# EAGLE board SparkFun_Qwiic_Micro_Accelerometer_BMA400-Panel (EAGLE 9.6.2), part 1 of 7
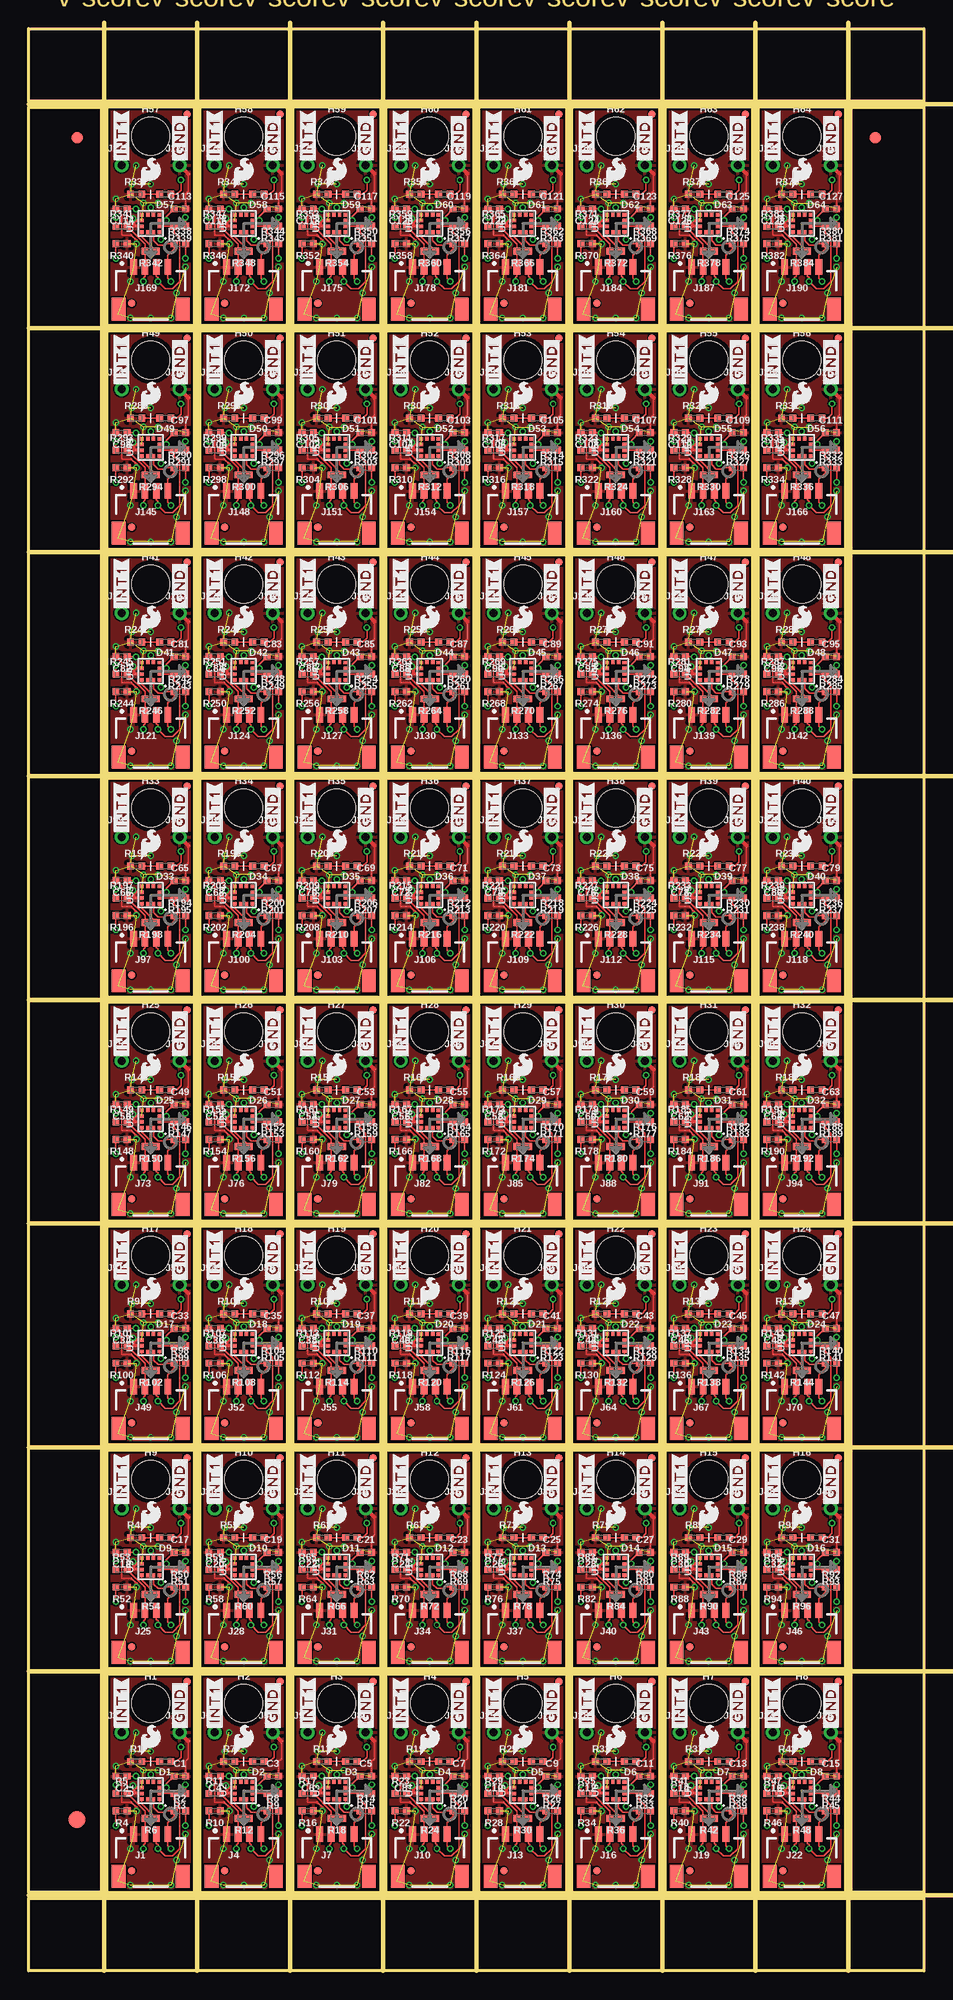
[diagram p0: board, top side]
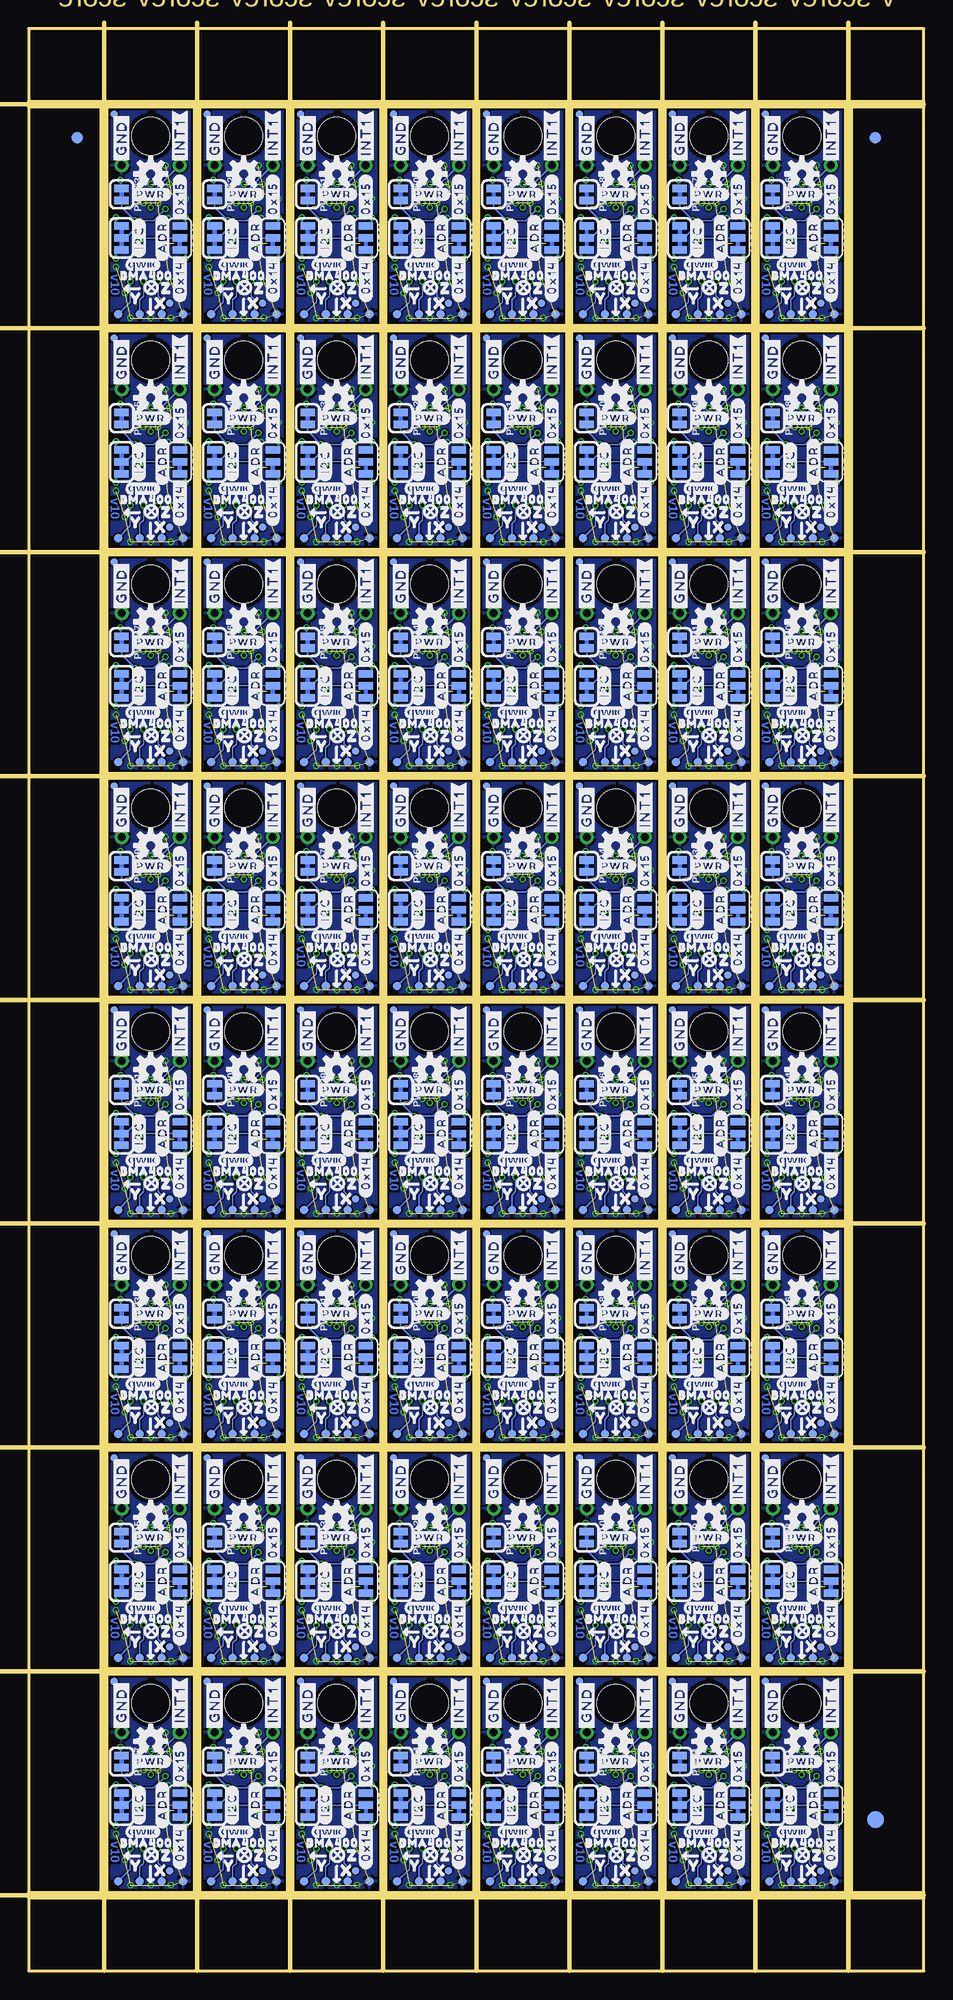
[diagram p1: board, bottom side, seen from below]

Size 78.23 x 169.67 mm. Coordinates in mm from the lower left corner, seen from the top.
Outline: 272 segments
Copper layers (1*16): Top 0.035mm / dielectric 1.5mm / Bottom 0.035mm
Design rules "SparkFun_Qwiic_Micro_Accelerometer_BMA400": minimum track width 5mil, minimum drill 0.3mm, track to track 5mil, track to pad 5mil, pad to pad 5mil, via to via 5mil, smd to smd 5mil, copper to edge 7mil, drill to drill 7mil, minimum pad ring 5mil, minimum via ring 5mil, stop-mask expansion 2.5mil, vias tented up to drill 25mil, thermal gap 10mil
tRestrict: area 9.9,15.7 to 9.9,15.8; area 18,15.7 to 18.1,15.8; area 26.1,15.7 to 26.2,15.8; area 34.2,15.7 to 34.3,15.8; area 42.4,15.7 to 42.4,15.8; area 50.5,15.7 to 50.6,15.8; area 58.6,15.7 to 58.7,15.8; area 66.8,15.7 to 66.8,15.8; area 9.9,35.3 to 9.9,35.3; area 18,35.3 to 18.1,35.3; area 26.1,35.3 to 26.2,35.3; area 34.2,35.3 to 34.3,35.3; 52 more areas
Milling: 18 lines

## Footprints (pad centres in the part's own frame; a part is rotated, then mirrored left to right if it is on the bottom)
SMT-JUMPER_3_1-NC_TRACE_SILK = smd 0.66 x 1.27: 1 -1.041,0; 2 0,0; 3 1.041,0
0402-TIGHT = smd 0.6 x 0.6: 1 -0.5,0; 2 0.5,0
LED-0402 = smd 0.6 x 0.6: A -0.5,0; C 0.5,0
FIDUCIAL-1X2 = smd 1 x 1: 1 0,0
FIDUCIAL-1.5X3 = smd 1.5 x 1.5: 1 0,0
FIDUCIAL-MICRO = smd 0.635 x 0.635: 1 0,0
STAND-OFF = hole 3.302: 0,0
SMT-JUMPER_3_2-NC_TRACE_SILK = smd 0.66 x 1.27: 1 -1.041,0; 2 0,0; 3 1.041,0
JST04_1MM_RA = smd 0.6 x 1.35: 1 -1.5,0; 2 -0.5,0; 3 0.5,0; 4 1.5,0 | smd 1.2 x 2: NC1 2.8,-3.675; NC2 -2.8,-3.675
1X01_1MM_NO_SILK = drill 0.7 pad 1.2: 1 0,0
SMT-JUMPER_2_NC_TRACE_SILK = smd 0.66 x 1.27: 1 -0.521,0; 2 0.521,0
PAD.03X.03 = smd 0.762 x 0.762: 1 0,0
BMA400 = smd 0.3 x 0.35: 1 -0.75,-0.775; 2 -0.25,-0.775; 3 0.25,-0.775; 4 0.75,-0.775; 7 0.75,0.775; 8 0.25,0.775; 9 -0.25,0.775; 10 -0.75,0.775 | smd 0.35 x 0.3: 5 0.775,-0.25; 6 0.775,0.25; 11 -0.775,0.25; 12 -0.775,-0.25

## Placement (x,y rotation side)
ADR  JUMPER-SMT_3_1-NC_TRACE_SILK  [SMT-JUMPER_3_1-NC_TRACE_SILK]  8.13,14.48 270 bottom
ADR1  JUMPER-SMT_3_1-NC_TRACE_SILK  [SMT-JUMPER_3_1-NC_TRACE_SILK]  16.26,14.48 270 bottom
ADR2  JUMPER-SMT_3_1-NC_TRACE_SILK  [SMT-JUMPER_3_1-NC_TRACE_SILK]  24.38,14.48 270 bottom
ADR3  JUMPER-SMT_3_1-NC_TRACE_SILK  [SMT-JUMPER_3_1-NC_TRACE_SILK]  32.51,14.48 270 bottom
ADR4  JUMPER-SMT_3_1-NC_TRACE_SILK  [SMT-JUMPER_3_1-NC_TRACE_SILK]  40.64,14.48 270 bottom
ADR5  JUMPER-SMT_3_1-NC_TRACE_SILK  [SMT-JUMPER_3_1-NC_TRACE_SILK]  48.77,14.48 270 bottom
ADR6  JUMPER-SMT_3_1-NC_TRACE_SILK  [SMT-JUMPER_3_1-NC_TRACE_SILK]  56.9,14.48 270 bottom
ADR7  JUMPER-SMT_3_1-NC_TRACE_SILK  [SMT-JUMPER_3_1-NC_TRACE_SILK]  65.02,14.48 270 bottom
ADR8  JUMPER-SMT_3_1-NC_TRACE_SILK  [SMT-JUMPER_3_1-NC_TRACE_SILK]  8.13,34.04 270 bottom
ADR9  JUMPER-SMT_3_1-NC_TRACE_SILK  [SMT-JUMPER_3_1-NC_TRACE_SILK]  16.26,34.04 270 bottom
ADR10  JUMPER-SMT_3_1-NC_TRACE_SILK  [SMT-JUMPER_3_1-NC_TRACE_SILK]  24.38,34.04 270 bottom
ADR11  JUMPER-SMT_3_1-NC_TRACE_SILK  [SMT-JUMPER_3_1-NC_TRACE_SILK]  32.51,34.04 270 bottom
ADR12  JUMPER-SMT_3_1-NC_TRACE_SILK  [SMT-JUMPER_3_1-NC_TRACE_SILK]  40.64,34.04 270 bottom
ADR13  JUMPER-SMT_3_1-NC_TRACE_SILK  [SMT-JUMPER_3_1-NC_TRACE_SILK]  48.77,34.04 270 bottom
ADR14  JUMPER-SMT_3_1-NC_TRACE_SILK  [SMT-JUMPER_3_1-NC_TRACE_SILK]  56.9,34.04 270 bottom
ADR15  JUMPER-SMT_3_1-NC_TRACE_SILK  [SMT-JUMPER_3_1-NC_TRACE_SILK]  65.02,34.04 270 bottom
ADR16  JUMPER-SMT_3_1-NC_TRACE_SILK  [SMT-JUMPER_3_1-NC_TRACE_SILK]  8.13,53.59 270 bottom
ADR17  JUMPER-SMT_3_1-NC_TRACE_SILK  [SMT-JUMPER_3_1-NC_TRACE_SILK]  16.26,53.59 270 bottom
ADR18  JUMPER-SMT_3_1-NC_TRACE_SILK  [SMT-JUMPER_3_1-NC_TRACE_SILK]  24.38,53.59 270 bottom
ADR19  JUMPER-SMT_3_1-NC_TRACE_SILK  [SMT-JUMPER_3_1-NC_TRACE_SILK]  32.51,53.59 270 bottom
ADR20  JUMPER-SMT_3_1-NC_TRACE_SILK  [SMT-JUMPER_3_1-NC_TRACE_SILK]  40.64,53.59 270 bottom
ADR21  JUMPER-SMT_3_1-NC_TRACE_SILK  [SMT-JUMPER_3_1-NC_TRACE_SILK]  48.77,53.59 270 bottom
ADR22  JUMPER-SMT_3_1-NC_TRACE_SILK  [SMT-JUMPER_3_1-NC_TRACE_SILK]  56.9,53.59 270 bottom
ADR23  JUMPER-SMT_3_1-NC_TRACE_SILK  [SMT-JUMPER_3_1-NC_TRACE_SILK]  65.02,53.59 270 bottom
ADR24  JUMPER-SMT_3_1-NC_TRACE_SILK  [SMT-JUMPER_3_1-NC_TRACE_SILK]  8.13,73.15 270 bottom
ADR25  JUMPER-SMT_3_1-NC_TRACE_SILK  [SMT-JUMPER_3_1-NC_TRACE_SILK]  16.26,73.15 270 bottom
ADR26  JUMPER-SMT_3_1-NC_TRACE_SILK  [SMT-JUMPER_3_1-NC_TRACE_SILK]  24.38,73.15 270 bottom
ADR27  JUMPER-SMT_3_1-NC_TRACE_SILK  [SMT-JUMPER_3_1-NC_TRACE_SILK]  32.51,73.15 270 bottom
ADR28  JUMPER-SMT_3_1-NC_TRACE_SILK  [SMT-JUMPER_3_1-NC_TRACE_SILK]  40.64,73.15 270 bottom
ADR29  JUMPER-SMT_3_1-NC_TRACE_SILK  [SMT-JUMPER_3_1-NC_TRACE_SILK]  48.77,73.15 270 bottom
ADR30  JUMPER-SMT_3_1-NC_TRACE_SILK  [SMT-JUMPER_3_1-NC_TRACE_SILK]  56.9,73.15 270 bottom
ADR31  JUMPER-SMT_3_1-NC_TRACE_SILK  [SMT-JUMPER_3_1-NC_TRACE_SILK]  65.02,73.15 270 bottom
ADR32  JUMPER-SMT_3_1-NC_TRACE_SILK  [SMT-JUMPER_3_1-NC_TRACE_SILK]  8.13,92.71 270 bottom
ADR33  JUMPER-SMT_3_1-NC_TRACE_SILK  [SMT-JUMPER_3_1-NC_TRACE_SILK]  16.26,92.71 270 bottom
ADR34  JUMPER-SMT_3_1-NC_TRACE_SILK  [SMT-JUMPER_3_1-NC_TRACE_SILK]  24.38,92.71 270 bottom
ADR35  JUMPER-SMT_3_1-NC_TRACE_SILK  [SMT-JUMPER_3_1-NC_TRACE_SILK]  32.51,92.71 270 bottom
ADR36  JUMPER-SMT_3_1-NC_TRACE_SILK  [SMT-JUMPER_3_1-NC_TRACE_SILK]  40.64,92.71 270 bottom
ADR37  JUMPER-SMT_3_1-NC_TRACE_SILK  [SMT-JUMPER_3_1-NC_TRACE_SILK]  48.77,92.71 270 bottom
ADR38  JUMPER-SMT_3_1-NC_TRACE_SILK  [SMT-JUMPER_3_1-NC_TRACE_SILK]  56.9,92.71 270 bottom
ADR39  JUMPER-SMT_3_1-NC_TRACE_SILK  [SMT-JUMPER_3_1-NC_TRACE_SILK]  65.02,92.71 270 bottom
ADR40  JUMPER-SMT_3_1-NC_TRACE_SILK  [SMT-JUMPER_3_1-NC_TRACE_SILK]  8.13,112.27 270 bottom
ADR41  JUMPER-SMT_3_1-NC_TRACE_SILK  [SMT-JUMPER_3_1-NC_TRACE_SILK]  16.26,112.27 270 bottom
ADR42  JUMPER-SMT_3_1-NC_TRACE_SILK  [SMT-JUMPER_3_1-NC_TRACE_SILK]  24.38,112.27 270 bottom
ADR43  JUMPER-SMT_3_1-NC_TRACE_SILK  [SMT-JUMPER_3_1-NC_TRACE_SILK]  32.51,112.27 270 bottom
ADR44  JUMPER-SMT_3_1-NC_TRACE_SILK  [SMT-JUMPER_3_1-NC_TRACE_SILK]  40.64,112.27 270 bottom
ADR45  JUMPER-SMT_3_1-NC_TRACE_SILK  [SMT-JUMPER_3_1-NC_TRACE_SILK]  48.77,112.27 270 bottom
ADR46  JUMPER-SMT_3_1-NC_TRACE_SILK  [SMT-JUMPER_3_1-NC_TRACE_SILK]  56.9,112.27 270 bottom
ADR47  JUMPER-SMT_3_1-NC_TRACE_SILK  [SMT-JUMPER_3_1-NC_TRACE_SILK]  65.02,112.27 270 bottom
ADR48  JUMPER-SMT_3_1-NC_TRACE_SILK  [SMT-JUMPER_3_1-NC_TRACE_SILK]  8.13,131.83 270 bottom
ADR49  JUMPER-SMT_3_1-NC_TRACE_SILK  [SMT-JUMPER_3_1-NC_TRACE_SILK]  16.26,131.83 270 bottom
ADR50  JUMPER-SMT_3_1-NC_TRACE_SILK  [SMT-JUMPER_3_1-NC_TRACE_SILK]  24.38,131.83 270 bottom
ADR51  JUMPER-SMT_3_1-NC_TRACE_SILK  [SMT-JUMPER_3_1-NC_TRACE_SILK]  32.51,131.83 270 bottom
ADR52  JUMPER-SMT_3_1-NC_TRACE_SILK  [SMT-JUMPER_3_1-NC_TRACE_SILK]  40.64,131.83 270 bottom
ADR53  JUMPER-SMT_3_1-NC_TRACE_SILK  [SMT-JUMPER_3_1-NC_TRACE_SILK]  48.77,131.83 270 bottom
ADR54  JUMPER-SMT_3_1-NC_TRACE_SILK  [SMT-JUMPER_3_1-NC_TRACE_SILK]  56.9,131.83 270 bottom
ADR55  JUMPER-SMT_3_1-NC_TRACE_SILK  [SMT-JUMPER_3_1-NC_TRACE_SILK]  65.02,131.83 270 bottom
ADR56  JUMPER-SMT_3_1-NC_TRACE_SILK  [SMT-JUMPER_3_1-NC_TRACE_SILK]  8.13,151.38 270 bottom
ADR57  JUMPER-SMT_3_1-NC_TRACE_SILK  [SMT-JUMPER_3_1-NC_TRACE_SILK]  16.26,151.38 270 bottom
ADR58  JUMPER-SMT_3_1-NC_TRACE_SILK  [SMT-JUMPER_3_1-NC_TRACE_SILK]  24.38,151.38 270 bottom
ADR59  JUMPER-SMT_3_1-NC_TRACE_SILK  [SMT-JUMPER_3_1-NC_TRACE_SILK]  32.51,151.38 270 bottom
ADR60  JUMPER-SMT_3_1-NC_TRACE_SILK  [SMT-JUMPER_3_1-NC_TRACE_SILK]  40.64,151.38 270 bottom
ADR61  JUMPER-SMT_3_1-NC_TRACE_SILK  [SMT-JUMPER_3_1-NC_TRACE_SILK]  48.77,151.38 270 bottom
ADR62  JUMPER-SMT_3_1-NC_TRACE_SILK  [SMT-JUMPER_3_1-NC_TRACE_SILK]  56.9,151.38 270 bottom
ADR63  JUMPER-SMT_3_1-NC_TRACE_SILK  [SMT-JUMPER_3_1-NC_TRACE_SILK]  65.02,151.38 270 bottom
C1  0.1uF  [0402-TIGHT]  13.21,17.02 0 top
C2  0.1uF  [0402-TIGHT]  8.13,17.02 180 top
C3  0.1uF  [0402-TIGHT]  21.34,17.02 0 top
C4  0.1uF  [0402-TIGHT]  16.26,17.02 180 top
C5  0.1uF  [0402-TIGHT]  29.46,17.02 0 top
C6  0.1uF  [0402-TIGHT]  24.38,17.02 180 top
C7  0.1uF  [0402-TIGHT]  37.59,17.02 0 top
C8  0.1uF  [0402-TIGHT]  32.51,17.02 180 top
C9  0.1uF  [0402-TIGHT]  45.72,17.02 0 top
C10  0.1uF  [0402-TIGHT]  40.64,17.02 180 top
C11  0.1uF  [0402-TIGHT]  53.85,17.02 0 top
C12  0.1uF  [0402-TIGHT]  48.77,17.02 180 top
C13  0.1uF  [0402-TIGHT]  61.98,17.02 0 top
C14  0.1uF  [0402-TIGHT]  56.9,17.02 180 top
C15  0.1uF  [0402-TIGHT]  70.1,17.02 0 top
C16  0.1uF  [0402-TIGHT]  65.02,17.02 180 top
C17  0.1uF  [0402-TIGHT]  13.21,36.58 0 top
C18  0.1uF  [0402-TIGHT]  8.13,36.58 180 top
C19  0.1uF  [0402-TIGHT]  21.34,36.58 0 top
C20  0.1uF  [0402-TIGHT]  16.26,36.58 180 top
C21  0.1uF  [0402-TIGHT]  29.46,36.58 0 top
C22  0.1uF  [0402-TIGHT]  24.38,36.58 180 top
C23  0.1uF  [0402-TIGHT]  37.59,36.58 0 top
C24  0.1uF  [0402-TIGHT]  32.51,36.58 180 top
C25  0.1uF  [0402-TIGHT]  45.72,36.58 0 top
C26  0.1uF  [0402-TIGHT]  40.64,36.58 180 top
C27  0.1uF  [0402-TIGHT]  53.85,36.58 0 top
C28  0.1uF  [0402-TIGHT]  48.77,36.58 180 top
C29  0.1uF  [0402-TIGHT]  61.98,36.58 0 top
C30  0.1uF  [0402-TIGHT]  56.9,36.58 180 top
C31  0.1uF  [0402-TIGHT]  70.1,36.58 0 top
C32  0.1uF  [0402-TIGHT]  65.02,36.58 180 top
C33  0.1uF  [0402-TIGHT]  13.21,56.13 0 top
C34  0.1uF  [0402-TIGHT]  8.13,56.13 180 top
C35  0.1uF  [0402-TIGHT]  21.34,56.13 0 top
C36  0.1uF  [0402-TIGHT]  16.26,56.13 180 top
C37  0.1uF  [0402-TIGHT]  29.46,56.13 0 top
C38  0.1uF  [0402-TIGHT]  24.38,56.13 180 top
C39  0.1uF  [0402-TIGHT]  37.59,56.13 0 top
C40  0.1uF  [0402-TIGHT]  32.51,56.13 180 top
C41  0.1uF  [0402-TIGHT]  45.72,56.13 0 top
C42  0.1uF  [0402-TIGHT]  40.64,56.13 180 top
C43  0.1uF  [0402-TIGHT]  53.85,56.13 0 top
C44  0.1uF  [0402-TIGHT]  48.77,56.13 180 top
C45  0.1uF  [0402-TIGHT]  61.98,56.13 0 top
C46  0.1uF  [0402-TIGHT]  56.9,56.13 180 top
C47  0.1uF  [0402-TIGHT]  70.1,56.13 0 top
C48  0.1uF  [0402-TIGHT]  65.02,56.13 180 top
C49  0.1uF  [0402-TIGHT]  13.21,75.69 0 top
C50  0.1uF  [0402-TIGHT]  8.13,75.69 180 top
C51  0.1uF  [0402-TIGHT]  21.34,75.69 0 top
C52  0.1uF  [0402-TIGHT]  16.26,75.69 180 top
C53  0.1uF  [0402-TIGHT]  29.46,75.69 0 top
C54  0.1uF  [0402-TIGHT]  24.38,75.69 180 top
C55  0.1uF  [0402-TIGHT]  37.59,75.69 0 top
C56  0.1uF  [0402-TIGHT]  32.51,75.69 180 top
C57  0.1uF  [0402-TIGHT]  45.72,75.69 0 top
C58  0.1uF  [0402-TIGHT]  40.64,75.69 180 top
C59  0.1uF  [0402-TIGHT]  53.85,75.69 0 top
C60  0.1uF  [0402-TIGHT]  48.77,75.69 180 top
C61  0.1uF  [0402-TIGHT]  61.98,75.69 0 top
C62  0.1uF  [0402-TIGHT]  56.9,75.69 180 top
C63  0.1uF  [0402-TIGHT]  70.1,75.69 0 top
C64  0.1uF  [0402-TIGHT]  65.02,75.69 180 top
C65  0.1uF  [0402-TIGHT]  13.21,95.25 0 top
C66  0.1uF  [0402-TIGHT]  8.13,95.25 180 top
C67  0.1uF  [0402-TIGHT]  21.34,95.25 0 top
C68  0.1uF  [0402-TIGHT]  16.26,95.25 180 top
C69  0.1uF  [0402-TIGHT]  29.46,95.25 0 top
C70  0.1uF  [0402-TIGHT]  24.38,95.25 180 top
C71  0.1uF  [0402-TIGHT]  37.59,95.25 0 top
C72  0.1uF  [0402-TIGHT]  32.51,95.25 180 top
C73  0.1uF  [0402-TIGHT]  45.72,95.25 0 top
C74  0.1uF  [0402-TIGHT]  40.64,95.25 180 top
C75  0.1uF  [0402-TIGHT]  53.85,95.25 0 top
C76  0.1uF  [0402-TIGHT]  48.77,95.25 180 top
C77  0.1uF  [0402-TIGHT]  61.98,95.25 0 top
C78  0.1uF  [0402-TIGHT]  56.9,95.25 180 top
C79  0.1uF  [0402-TIGHT]  70.1,95.25 0 top
C80  0.1uF  [0402-TIGHT]  65.02,95.25 180 top
C81  0.1uF  [0402-TIGHT]  13.21,114.81 0 top
C82  0.1uF  [0402-TIGHT]  8.13,114.81 180 top
C83  0.1uF  [0402-TIGHT]  21.34,114.81 0 top
C84  0.1uF  [0402-TIGHT]  16.26,114.81 180 top
C85  0.1uF  [0402-TIGHT]  29.46,114.81 0 top
C86  0.1uF  [0402-TIGHT]  24.38,114.81 180 top
C87  0.1uF  [0402-TIGHT]  37.59,114.81 0 top
C88  0.1uF  [0402-TIGHT]  32.51,114.81 180 top
C89  0.1uF  [0402-TIGHT]  45.72,114.81 0 top
C90  0.1uF  [0402-TIGHT]  40.64,114.81 180 top
C91  0.1uF  [0402-TIGHT]  53.85,114.81 0 top
C92  0.1uF  [0402-TIGHT]  48.77,114.81 180 top
C93  0.1uF  [0402-TIGHT]  61.98,114.81 0 top
C94  0.1uF  [0402-TIGHT]  56.9,114.81 180 top
C95  0.1uF  [0402-TIGHT]  70.1,114.81 0 top
C96  0.1uF  [0402-TIGHT]  65.02,114.81 180 top
C97  0.1uF  [0402-TIGHT]  13.21,134.37 0 top
C98  0.1uF  [0402-TIGHT]  8.13,134.37 180 top
C99  0.1uF  [0402-TIGHT]  21.34,134.37 0 top
C100  0.1uF  [0402-TIGHT]  16.26,134.37 180 top
C101  0.1uF  [0402-TIGHT]  29.46,134.37 0 top
C102  0.1uF  [0402-TIGHT]  24.38,134.37 180 top
C103  0.1uF  [0402-TIGHT]  37.59,134.37 0 top
C104  0.1uF  [0402-TIGHT]  32.51,134.37 180 top
C105  0.1uF  [0402-TIGHT]  45.72,134.37 0 top
C106  0.1uF  [0402-TIGHT]  40.64,134.37 180 top
C107  0.1uF  [0402-TIGHT]  53.85,134.37 0 top
C108  0.1uF  [0402-TIGHT]  48.77,134.37 180 top
C109  0.1uF  [0402-TIGHT]  61.98,134.37 0 top
C110  0.1uF  [0402-TIGHT]  56.9,134.37 180 top
C111  0.1uF  [0402-TIGHT]  70.1,134.37 0 top
C112  0.1uF  [0402-TIGHT]  65.02,134.37 180 top
C113  0.1uF  [0402-TIGHT]  13.21,153.92 0 top
C114  0.1uF  [0402-TIGHT]  8.13,153.92 180 top
C115  0.1uF  [0402-TIGHT]  21.34,153.92 0 top
C116  0.1uF  [0402-TIGHT]  16.26,153.92 180 top
C117  0.1uF  [0402-TIGHT]  29.46,153.92 0 top
C118  0.1uF  [0402-TIGHT]  24.38,153.92 180 top
C119  0.1uF  [0402-TIGHT]  37.59,153.92 0 top
C120  0.1uF  [0402-TIGHT]  32.51,153.92 180 top
C121  0.1uF  [0402-TIGHT]  45.72,153.92 0 top
C122  0.1uF  [0402-TIGHT]  40.64,153.92 180 top
C123  0.1uF  [0402-TIGHT]  53.85,153.92 0 top
C124  0.1uF  [0402-TIGHT]  48.77,153.92 180 top
C125  0.1uF  [0402-TIGHT]  61.98,153.92 0 top
C126  0.1uF  [0402-TIGHT]  56.9,153.92 180 top
C127  0.1uF  [0402-TIGHT]  70.1,153.92 0 top
C128  0.1uF  [0402-TIGHT]  65.02,153.92 180 top
D1  RED  [LED-0402]  11.94,18.29 180 top
D2  RED  [LED-0402]  20.07,18.29 180 top
D3  RED  [LED-0402]  28.19,18.29 180 top
D4  RED  [LED-0402]  36.32,18.29 180 top
D5  RED  [LED-0402]  44.45,18.29 180 top
D6  RED  [LED-0402]  52.58,18.29 180 top
D7  RED  [LED-0402]  60.71,18.29 180 top
D8  RED  [LED-0402]  68.83,18.29 180 top
D9  RED  [LED-0402]  11.94,37.85 180 top
D10  RED  [LED-0402]  20.07,37.85 180 top
D11  RED  [LED-0402]  28.19,37.85 180 top
D12  RED  [LED-0402]  36.32,37.85 180 top
D13  RED  [LED-0402]  44.45,37.85 180 top
D14  RED  [LED-0402]  52.58,37.85 180 top
D15  RED  [LED-0402]  60.71,37.85 180 top
D16  RED  [LED-0402]  68.83,37.85 180 top
D17  RED  [LED-0402]  11.94,57.4 180 top
D18  RED  [LED-0402]  20.07,57.4 180 top
D19  RED  [LED-0402]  28.19,57.4 180 top
D20  RED  [LED-0402]  36.32,57.4 180 top
D21  RED  [LED-0402]  44.45,57.4 180 top
D22  RED  [LED-0402]  52.58,57.4 180 top
D23  RED  [LED-0402]  60.71,57.4 180 top
D24  RED  [LED-0402]  68.83,57.4 180 top
D25  RED  [LED-0402]  11.94,76.96 180 top
D26  RED  [LED-0402]  20.07,76.96 180 top
D27  RED  [LED-0402]  28.19,76.96 180 top
D28  RED  [LED-0402]  36.32,76.96 180 top
D29  RED  [LED-0402]  44.45,76.96 180 top
D30  RED  [LED-0402]  52.58,76.96 180 top
D31  RED  [LED-0402]  60.71,76.96 180 top
D32  RED  [LED-0402]  68.83,76.96 180 top
D33  RED  [LED-0402]  11.94,96.52 180 top
D34  RED  [LED-0402]  20.07,96.52 180 top
D35  RED  [LED-0402]  28.19,96.52 180 top
D36  RED  [LED-0402]  36.32,96.52 180 top
D37  RED  [LED-0402]  44.45,96.52 180 top
D38  RED  [LED-0402]  52.58,96.52 180 top
D39  RED  [LED-0402]  60.71,96.52 180 top
D40  RED  [LED-0402]  68.83,96.52 180 top
D41  RED  [LED-0402]  11.94,116.08 180 top
D42  RED  [LED-0402]  20.07,116.08 180 top
D43  RED  [LED-0402]  28.19,116.08 180 top
D44  RED  [LED-0402]  36.32,116.08 180 top
D45  RED  [LED-0402]  44.45,116.08 180 top
D46  RED  [LED-0402]  52.58,116.08 180 top
D47  RED  [LED-0402]  60.71,116.08 180 top
D48  RED  [LED-0402]  68.83,116.08 180 top
D49  RED  [LED-0402]  11.94,135.64 180 top
D50  RED  [LED-0402]  20.07,135.64 180 top
D51  RED  [LED-0402]  28.19,135.64 180 top
D52  RED  [LED-0402]  36.32,135.64 180 top
D53  RED  [LED-0402]  44.45,135.64 180 top
D54  RED  [LED-0402]  52.58,135.64 180 top
D55  RED  [LED-0402]  60.71,135.64 180 top
D56  RED  [LED-0402]  68.83,135.64 180 top
D57  RED  [LED-0402]  11.94,155.19 180 top
D58  RED  [LED-0402]  20.07,155.19 180 top
D59  RED  [LED-0402]  28.19,155.19 180 top
D60  RED  [LED-0402]  36.32,155.19 180 top
D61  RED  [LED-0402]  44.45,155.19 180 top
D62  RED  [LED-0402]  52.58,155.19 180 top
D63  RED  [LED-0402]  60.71,155.19 180 top
D64  RED  [LED-0402]  68.83,155.19 180 top
E$1  [FIDUCIAL-1X2]  4.23,160.15 0 top
E$2  [FIDUCIAL-1X2]  4.23,160.15 0 bottom
E$3  [FIDUCIAL-1X2]  74,160.15 0 top
E$4  [FIDUCIAL-1X2]  74,160.15 0 bottom
E$5  [FIDUCIAL-1.5X3]  4.23,13.21 0 top
E$6  [FIDUCIAL-1.5X3]  4.23,13.21 0 bottom
FD1  FIDUCIALUFIDUCIAL  [FIDUCIAL-MICRO]  9.02,8.76 0 bottom
FD2  FIDUCIALUFIDUCIAL  [FIDUCIAL-MICRO]  9.02,8.76 0 top
FD3  FIDUCIALUFIDUCIAL  [FIDUCIAL-MICRO]  13.84,25.27 0 top
FD4  FIDUCIALUFIDUCIAL  [FIDUCIAL-MICRO]  13.84,25.27 0 bottom
FD5  FIDUCIALUFIDUCIAL  [FIDUCIAL-MICRO]  17.14,8.76 0 bottom
FD6  FIDUCIALUFIDUCIAL  [FIDUCIAL-MICRO]  17.14,8.76 0 top
FD7  FIDUCIALUFIDUCIAL  [FIDUCIAL-MICRO]  21.97,25.27 0 top
FD8  FIDUCIALUFIDUCIAL  [FIDUCIAL-MICRO]  21.97,25.27 0 bottom
FD9  FIDUCIALUFIDUCIAL  [FIDUCIAL-MICRO]  25.27,8.76 0 bottom
FD10  FIDUCIALUFIDUCIAL  [FIDUCIAL-MICRO]  25.27,8.76 0 top
FD11  FIDUCIALUFIDUCIAL  [FIDUCIAL-MICRO]  30.1,25.27 0 top
FD12  FIDUCIALUFIDUCIAL  [FIDUCIAL-MICRO]  30.1,25.27 0 bottom
FD13  FIDUCIALUFIDUCIAL  [FIDUCIAL-MICRO]  33.4,8.76 0 bottom
FD14  FIDUCIALUFIDUCIAL  [FIDUCIAL-MICRO]  33.4,8.76 0 top
FD15  FIDUCIALUFIDUCIAL  [FIDUCIAL-MICRO]  38.23,25.27 0 top
FD16  FIDUCIALUFIDUCIAL  [FIDUCIAL-MICRO]  38.23,25.27 0 bottom
FD17  FIDUCIALUFIDUCIAL  [FIDUCIAL-MICRO]  41.53,8.76 0 bottom
FD18  FIDUCIALUFIDUCIAL  [FIDUCIAL-MICRO]  41.53,8.76 0 top
FD19  FIDUCIALUFIDUCIAL  [FIDUCIAL-MICRO]  46.35,25.27 0 top
FD20  FIDUCIALUFIDUCIAL  [FIDUCIAL-MICRO]  46.35,25.27 0 bottom
FD21  FIDUCIALUFIDUCIAL  [FIDUCIAL-MICRO]  49.66,8.76 0 bottom
FD22  FIDUCIALUFIDUCIAL  [FIDUCIAL-MICRO]  49.66,8.76 0 top
FD23  FIDUCIALUFIDUCIAL  [FIDUCIAL-MICRO]  54.48,25.27 0 top
FD24  FIDUCIALUFIDUCIAL  [FIDUCIAL-MICRO]  54.48,25.27 0 bottom
FD25  FIDUCIALUFIDUCIAL  [FIDUCIAL-MICRO]  57.78,8.76 0 bottom
FD26  FIDUCIALUFIDUCIAL  [FIDUCIAL-MICRO]  57.78,8.76 0 top
FD27  FIDUCIALUFIDUCIAL  [FIDUCIAL-MICRO]  62.61,25.27 0 top
FD28  FIDUCIALUFIDUCIAL  [FIDUCIAL-MICRO]  62.61,25.27 0 bottom
FD29  FIDUCIALUFIDUCIAL  [FIDUCIAL-MICRO]  65.91,8.76 0 bottom
FD30  FIDUCIALUFIDUCIAL  [FIDUCIAL-MICRO]  65.91,8.76 0 top
FD31  FIDUCIALUFIDUCIAL  [FIDUCIAL-MICRO]  70.74,25.27 0 top
FD32  FIDUCIALUFIDUCIAL  [FIDUCIAL-MICRO]  70.74,25.27 0 bottom
FD33  FIDUCIALUFIDUCIAL  [FIDUCIAL-MICRO]  9.02,28.32 0 bottom
FD34  FIDUCIALUFIDUCIAL  [FIDUCIAL-MICRO]  9.02,28.32 0 top
FD35  FIDUCIALUFIDUCIAL  [FIDUCIAL-MICRO]  13.84,44.83 0 top
FD36  FIDUCIALUFIDUCIAL  [FIDUCIAL-MICRO]  13.84,44.83 0 bottom
FD37  FIDUCIALUFIDUCIAL  [FIDUCIAL-MICRO]  17.14,28.32 0 bottom
FD38  FIDUCIALUFIDUCIAL  [FIDUCIAL-MICRO]  17.14,28.32 0 top
FD39  FIDUCIALUFIDUCIAL  [FIDUCIAL-MICRO]  21.97,44.83 0 top
FD40  FIDUCIALUFIDUCIAL  [FIDUCIAL-MICRO]  21.97,44.83 0 bottom
FD41  FIDUCIALUFIDUCIAL  [FIDUCIAL-MICRO]  25.27,28.32 0 bottom
FD42  FIDUCIALUFIDUCIAL  [FIDUCIAL-MICRO]  25.27,28.32 0 top
FD43  FIDUCIALUFIDUCIAL  [FIDUCIAL-MICRO]  30.1,44.83 0 top
FD44  FIDUCIALUFIDUCIAL  [FIDUCIAL-MICRO]  30.1,44.83 0 bottom
FD45  FIDUCIALUFIDUCIAL  [FIDUCIAL-MICRO]  33.4,28.32 0 bottom
FD46  FIDUCIALUFIDUCIAL  [FIDUCIAL-MICRO]  33.4,28.32 0 top
FD47  FIDUCIALUFIDUCIAL  [FIDUCIAL-MICRO]  38.23,44.83 0 top
FD48  FIDUCIALUFIDUCIAL  [FIDUCIAL-MICRO]  38.23,44.83 0 bottom
FD49  FIDUCIALUFIDUCIAL  [FIDUCIAL-MICRO]  41.53,28.32 0 bottom
FD50  FIDUCIALUFIDUCIAL  [FIDUCIAL-MICRO]  41.53,28.32 0 top
FD51  FIDUCIALUFIDUCIAL  [FIDUCIAL-MICRO]  46.35,44.83 0 top
FD52  FIDUCIALUFIDUCIAL  [FIDUCIAL-MICRO]  46.35,44.83 0 bottom
FD53  FIDUCIALUFIDUCIAL  [FIDUCIAL-MICRO]  49.66,28.32 0 bottom
FD54  FIDUCIALUFIDUCIAL  [FIDUCIAL-MICRO]  49.66,28.32 0 top
FD55  FIDUCIALUFIDUCIAL  [FIDUCIAL-MICRO]  54.48,44.83 0 top
FD56  FIDUCIALUFIDUCIAL  [FIDUCIAL-MICRO]  54.48,44.83 0 bottom
FD57  FIDUCIALUFIDUCIAL  [FIDUCIAL-MICRO]  57.78,28.32 0 bottom
FD58  FIDUCIALUFIDUCIAL  [FIDUCIAL-MICRO]  57.78,28.32 0 top
FD59  FIDUCIALUFIDUCIAL  [FIDUCIAL-MICRO]  62.61,44.83 0 top
FD60  FIDUCIALUFIDUCIAL  [FIDUCIAL-MICRO]  62.61,44.83 0 bottom
FD61  FIDUCIALUFIDUCIAL  [FIDUCIAL-MICRO]  65.91,28.32 0 bottom
FD62  FIDUCIALUFIDUCIAL  [FIDUCIAL-MICRO]  65.91,28.32 0 top
FD63  FIDUCIALUFIDUCIAL  [FIDUCIAL-MICRO]  70.74,44.83 0 top
FD64  FIDUCIALUFIDUCIAL  [FIDUCIAL-MICRO]  70.74,44.83 0 bottom
FD65  FIDUCIALUFIDUCIAL  [FIDUCIAL-MICRO]  9.02,47.88 0 bottom
FD66  FIDUCIALUFIDUCIAL  [FIDUCIAL-MICRO]  9.02,47.88 0 top
FD67  FIDUCIALUFIDUCIAL  [FIDUCIAL-MICRO]  13.84,64.39 0 top
FD68  FIDUCIALUFIDUCIAL  [FIDUCIAL-MICRO]  13.84,64.39 0 bottom
FD69  FIDUCIALUFIDUCIAL  [FIDUCIAL-MICRO]  17.14,47.88 0 bottom
FD70  FIDUCIALUFIDUCIAL  [FIDUCIAL-MICRO]  17.14,47.88 0 top
FD71  FIDUCIALUFIDUCIAL  [FIDUCIAL-MICRO]  21.97,64.39 0 top
FD72  FIDUCIALUFIDUCIAL  [FIDUCIAL-MICRO]  21.97,64.39 0 bottom
FD73  FIDUCIALUFIDUCIAL  [FIDUCIAL-MICRO]  25.27,47.88 0 bottom
FD74  FIDUCIALUFIDUCIAL  [FIDUCIAL-MICRO]  25.27,47.88 0 top
FD75  FIDUCIALUFIDUCIAL  [FIDUCIAL-MICRO]  30.1,64.39 0 top
FD76  FIDUCIALUFIDUCIAL  [FIDUCIAL-MICRO]  30.1,64.39 0 bottom
FD77  FIDUCIALUFIDUCIAL  [FIDUCIAL-MICRO]  33.4,47.88 0 bottom
FD78  FIDUCIALUFIDUCIAL  [FIDUCIAL-MICRO]  33.4,47.88 0 top
FD79  FIDUCIALUFIDUCIAL  [FIDUCIAL-MICRO]  38.23,64.39 0 top
FD80  FIDUCIALUFIDUCIAL  [FIDUCIAL-MICRO]  38.23,64.39 0 bottom
FD81  FIDUCIALUFIDUCIAL  [FIDUCIAL-MICRO]  41.53,47.88 0 bottom
FD82  FIDUCIALUFIDUCIAL  [FIDUCIAL-MICRO]  41.53,47.88 0 top
FD83  FIDUCIALUFIDUCIAL  [FIDUCIAL-MICRO]  46.35,64.39 0 top
FD84  FIDUCIALUFIDUCIAL  [FIDUCIAL-MICRO]  46.35,64.39 0 bottom
FD85  FIDUCIALUFIDUCIAL  [FIDUCIAL-MICRO]  49.66,47.88 0 bottom
FD86  FIDUCIALUFIDUCIAL  [FIDUCIAL-MICRO]  49.66,47.88 0 top
FD87  FIDUCIALUFIDUCIAL  [FIDUCIAL-MICRO]  54.48,64.39 0 top
FD88  FIDUCIALUFIDUCIAL  [FIDUCIAL-MICRO]  54.48,64.39 0 bottom
FD89  FIDUCIALUFIDUCIAL  [FIDUCIAL-MICRO]  57.78,47.88 0 bottom
FD90  FIDUCIALUFIDUCIAL  [FIDUCIAL-MICRO]  57.78,47.88 0 top
FD91  FIDUCIALUFIDUCIAL  [FIDUCIAL-MICRO]  62.61,64.39 0 top
FD92  FIDUCIALUFIDUCIAL  [FIDUCIAL-MICRO]  62.61,64.39 0 bottom
FD93  FIDUCIALUFIDUCIAL  [FIDUCIAL-MICRO]  65.91,47.88 0 bottom
FD94  FIDUCIALUFIDUCIAL  [FIDUCIAL-MICRO]  65.91,47.88 0 top
FD95  FIDUCIALUFIDUCIAL  [FIDUCIAL-MICRO]  70.74,64.39 0 top
FD96  FIDUCIALUFIDUCIAL  [FIDUCIAL-MICRO]  70.74,64.39 0 bottom
FD97  FIDUCIALUFIDUCIAL  [FIDUCIAL-MICRO]  9.02,67.44 0 bottom
FD98  FIDUCIALUFIDUCIAL  [FIDUCIAL-MICRO]  9.02,67.44 0 top
FD99  FIDUCIALUFIDUCIAL  [FIDUCIAL-MICRO]  13.84,83.95 0 top
FD100  FIDUCIALUFIDUCIAL  [FIDUCIAL-MICRO]  13.84,83.95 0 bottom
FD101  FIDUCIALUFIDUCIAL  [FIDUCIAL-MICRO]  17.14,67.44 0 bottom
FD102  FIDUCIALUFIDUCIAL  [FIDUCIAL-MICRO]  17.14,67.44 0 top
FD103  FIDUCIALUFIDUCIAL  [FIDUCIAL-MICRO]  21.97,83.95 0 top
FD104  FIDUCIALUFIDUCIAL  [FIDUCIAL-MICRO]  21.97,83.95 0 bottom
FD105  FIDUCIALUFIDUCIAL  [FIDUCIAL-MICRO]  25.27,67.44 0 bottom
FD106  FIDUCIALUFIDUCIAL  [FIDUCIAL-MICRO]  25.27,67.44 0 top
FD107  FIDUCIALUFIDUCIAL  [FIDUCIAL-MICRO]  30.1,83.95 0 top
FD108  FIDUCIALUFIDUCIAL  [FIDUCIAL-MICRO]  30.1,83.95 0 bottom
FD109  FIDUCIALUFIDUCIAL  [FIDUCIAL-MICRO]  33.4,67.44 0 bottom
FD110  FIDUCIALUFIDUCIAL  [FIDUCIAL-MICRO]  33.4,67.44 0 top
FD111  FIDUCIALUFIDUCIAL  [FIDUCIAL-MICRO]  38.23,83.95 0 top
FD112  FIDUCIALUFIDUCIAL  [FIDUCIAL-MICRO]  38.23,83.95 0 bottom
FD113  FIDUCIALUFIDUCIAL  [FIDUCIAL-MICRO]  41.53,67.44 0 bottom
FD114  FIDUCIALUFIDUCIAL  [FIDUCIAL-MICRO]  41.53,67.44 0 top
FD115  FIDUCIALUFIDUCIAL  [FIDUCIAL-MICRO]  46.35,83.95 0 top
FD116  FIDUCIALUFIDUCIAL  [FIDUCIAL-MICRO]  46.35,83.95 0 bottom
FD117  FIDUCIALUFIDUCIAL  [FIDUCIAL-MICRO]  49.66,67.44 0 bottom
FD118  FIDUCIALUFIDUCIAL  [FIDUCIAL-MICRO]  49.66,67.44 0 top
FD119  FIDUCIALUFIDUCIAL  [FIDUCIAL-MICRO]  54.48,83.95 0 top
FD120  FIDUCIALUFIDUCIAL  [FIDUCIAL-MICRO]  54.48,83.95 0 bottom
FD121  FIDUCIALUFIDUCIAL  [FIDUCIAL-MICRO]  57.78,67.44 0 bottom
FD122  FIDUCIALUFIDUCIAL  [FIDUCIAL-MICRO]  57.78,67.44 0 top
FD123  FIDUCIALUFIDUCIAL  [FIDUCIAL-MICRO]  62.61,83.95 0 top
FD124  FIDUCIALUFIDUCIAL  [FIDUCIAL-MICRO]  62.61,83.95 0 bottom
FD125  FIDUCIALUFIDUCIAL  [FIDUCIAL-MICRO]  65.91,67.44 0 bottom
FD126  FIDUCIALUFIDUCIAL  [FIDUCIAL-MICRO]  65.91,67.44 0 top
FD127  FIDUCIALUFIDUCIAL  [FIDUCIAL-MICRO]  70.74,83.95 0 top
FD128  FIDUCIALUFIDUCIAL  [FIDUCIAL-MICRO]  70.74,83.95 0 bottom
FD129  FIDUCIALUFIDUCIAL  [FIDUCIAL-MICRO]  9.02,87 0 bottom
FD130  FIDUCIALUFIDUCIAL  [FIDUCIAL-MICRO]  9.02,87 0 top
FD131  FIDUCIALUFIDUCIAL  [FIDUCIAL-MICRO]  13.84,103.51 0 top
FD132  FIDUCIALUFIDUCIAL  [FIDUCIAL-MICRO]  13.84,103.51 0 bottom
FD133  FIDUCIALUFIDUCIAL  [FIDUCIAL-MICRO]  17.14,87 0 bottom
FD134  FIDUCIALUFIDUCIAL  [FIDUCIAL-MICRO]  17.14,87 0 top
FD135  FIDUCIALUFIDUCIAL  [FIDUCIAL-MICRO]  21.97,103.51 0 top
FD136  FIDUCIALUFIDUCIAL  [FIDUCIAL-MICRO]  21.97,103.51 0 bottom
FD137  FIDUCIALUFIDUCIAL  [FIDUCIAL-MICRO]  25.27,87 0 bottom
FD138  FIDUCIALUFIDUCIAL  [FIDUCIAL-MICRO]  25.27,87 0 top
FD139  FIDUCIALUFIDUCIAL  [FIDUCIAL-MICRO]  30.1,103.51 0 top
FD140  FIDUCIALUFIDUCIAL  [FIDUCIAL-MICRO]  30.1,103.51 0 bottom
FD141  FIDUCIALUFIDUCIAL  [FIDUCIAL-MICRO]  33.4,87 0 bottom
FD142  FIDUCIALUFIDUCIAL  [FIDUCIAL-MICRO]  33.4,87 0 top
FD143  FIDUCIALUFIDUCIAL  [FIDUCIAL-MICRO]  38.23,103.51 0 top
FD144  FIDUCIALUFIDUCIAL  [FIDUCIAL-MICRO]  38.23,103.51 0 bottom
FD145  FIDUCIALUFIDUCIAL  [FIDUCIAL-MICRO]  41.53,87 0 bottom
FD146  FIDUCIALUFIDUCIAL  [FIDUCIAL-MICRO]  41.53,87 0 top
FD147  FIDUCIALUFIDUCIAL  [FIDUCIAL-MICRO]  46.35,103.51 0 top
FD148  FIDUCIALUFIDUCIAL  [FIDUCIAL-MICRO]  46.35,103.51 0 bottom
FD149  FIDUCIALUFIDUCIAL  [FIDUCIAL-MICRO]  49.66,87 0 bottom
FD150  FIDUCIALUFIDUCIAL  [FIDUCIAL-MICRO]  49.66,87 0 top
FD151  FIDUCIALUFIDUCIAL  [FIDUCIAL-MICRO]  54.48,103.51 0 top
FD152  FIDUCIALUFIDUCIAL  [FIDUCIAL-MICRO]  54.48,103.51 0 bottom
FD153  FIDUCIALUFIDUCIAL  [FIDUCIAL-MICRO]  57.78,87 0 bottom
FD154  FIDUCIALUFIDUCIAL  [FIDUCIAL-MICRO]  57.78,87 0 top
FD155  FIDUCIALUFIDUCIAL  [FIDUCIAL-MICRO]  62.61,103.51 0 top
FD156  FIDUCIALUFIDUCIAL  [FIDUCIAL-MICRO]  62.61,103.51 0 bottom
FD157  FIDUCIALUFIDUCIAL  [FIDUCIAL-MICRO]  65.91,87 0 bottom
FD158  FIDUCIALUFIDUCIAL  [FIDUCIAL-MICRO]  65.91,87 0 top
FD159  FIDUCIALUFIDUCIAL  [FIDUCIAL-MICRO]  70.74,103.51 0 top
FD160  FIDUCIALUFIDUCIAL  [FIDUCIAL-MICRO]  70.74,103.51 0 bottom
FD161  FIDUCIALUFIDUCIAL  [FIDUCIAL-MICRO]  9.02,106.55 0 bottom
FD162  FIDUCIALUFIDUCIAL  [FIDUCIAL-MICRO]  9.02,106.55 0 top
FD163  FIDUCIALUFIDUCIAL  [FIDUCIAL-MICRO]  13.84,123.06 0 top
FD164  FIDUCIALUFIDUCIAL  [FIDUCIAL-MICRO]  13.84,123.06 0 bottom
FD165  FIDUCIALUFIDUCIAL  [FIDUCIAL-MICRO]  17.14,106.55 0 bottom
FD166  FIDUCIALUFIDUCIAL  [FIDUCIAL-MICRO]  17.14,106.55 0 top
FD167  FIDUCIALUFIDUCIAL  [FIDUCIAL-MICRO]  21.97,123.06 0 top
FD168  FIDUCIALUFIDUCIAL  [FIDUCIAL-MICRO]  21.97,123.06 0 bottom
FD169  FIDUCIALUFIDUCIAL  [FIDUCIAL-MICRO]  25.27,106.55 0 bottom
FD170  FIDUCIALUFIDUCIAL  [FIDUCIAL-MICRO]  25.27,106.55 0 top
FD171  FIDUCIALUFIDUCIAL  [FIDUCIAL-MICRO]  30.1,123.06 0 top
FD172  FIDUCIALUFIDUCIAL  [FIDUCIAL-MICRO]  30.1,123.06 0 bottom
FD173  FIDUCIALUFIDUCIAL  [FIDUCIAL-MICRO]  33.4,106.55 0 bottom
FD174  FIDUCIALUFIDUCIAL  [FIDUCIAL-MICRO]  33.4,106.55 0 top
FD175  FIDUCIALUFIDUCIAL  [FIDUCIAL-MICRO]  38.23,123.06 0 top
FD176  FIDUCIALUFIDUCIAL  [FIDUCIAL-MICRO]  38.23,123.06 0 bottom
FD177  FIDUCIALUFIDUCIAL  [FIDUCIAL-MICRO]  41.53,106.55 0 bottom
FD178  FIDUCIALUFIDUCIAL  [FIDUCIAL-MICRO]  41.53,106.55 0 top
FD179  FIDUCIALUFIDUCIAL  [FIDUCIAL-MICRO]  46.35,123.06 0 top
FD180  FIDUCIALUFIDUCIAL  [FIDUCIAL-MICRO]  46.35,123.06 0 bottom
FD181  FIDUCIALUFIDUCIAL  [FIDUCIAL-MICRO]  49.66,106.55 0 bottom
FD182  FIDUCIALUFIDUCIAL  [FIDUCIAL-MICRO]  49.66,106.55 0 top
FD183  FIDUCIALUFIDUCIAL  [FIDUCIAL-MICRO]  54.48,123.06 0 top
FD184  FIDUCIALUFIDUCIAL  [FIDUCIAL-MICRO]  54.48,123.06 0 bottom
FD185  FIDUCIALUFIDUCIAL  [FIDUCIAL-MICRO]  57.78,106.55 0 bottom
FD186  FIDUCIALUFIDUCIAL  [FIDUCIAL-MICRO]  57.78,106.55 0 top
FD187  FIDUCIALUFIDUCIAL  [FIDUCIAL-MICRO]  62.61,123.06 0 top
FD188  FIDUCIALUFIDUCIAL  [FIDUCIAL-MICRO]  62.61,123.06 0 bottom
FD189  FIDUCIALUFIDUCIAL  [FIDUCIAL-MICRO]  65.91,106.55 0 bottom
FD190  FIDUCIALUFIDUCIAL  [FIDUCIAL-MICRO]  65.91,106.55 0 top
FD191  FIDUCIALUFIDUCIAL  [FIDUCIAL-MICRO]  70.74,123.06 0 top
FD192  FIDUCIALUFIDUCIAL  [FIDUCIAL-MICRO]  70.74,123.06 0 bottom
FD193  FIDUCIALUFIDUCIAL  [FIDUCIAL-MICRO]  9.02,126.11 0 bottom
FD194  FIDUCIALUFIDUCIAL  [FIDUCIAL-MICRO]  9.02,126.11 0 top
FD195  FIDUCIALUFIDUCIAL  [FIDUCIAL-MICRO]  13.84,142.62 0 top
FD196  FIDUCIALUFIDUCIAL  [FIDUCIAL-MICRO]  13.84,142.62 0 bottom
FD197  FIDUCIALUFIDUCIAL  [FIDUCIAL-MICRO]  17.14,126.11 0 bottom
FD198  FIDUCIALUFIDUCIAL  [FIDUCIAL-MICRO]  17.14,126.11 0 top
FD199  FIDUCIALUFIDUCIAL  [FIDUCIAL-MICRO]  21.97,142.62 0 top
FD200  FIDUCIALUFIDUCIAL  [FIDUCIAL-MICRO]  21.97,142.62 0 bottom
FD201  FIDUCIALUFIDUCIAL  [FIDUCIAL-MICRO]  25.27,126.11 0 bottom
FD202  FIDUCIALUFIDUCIAL  [FIDUCIAL-MICRO]  25.27,126.11 0 top
FD203  FIDUCIALUFIDUCIAL  [FIDUCIAL-MICRO]  30.1,142.62 0 top
FD204  FIDUCIALUFIDUCIAL  [FIDUCIAL-MICRO]  30.1,142.62 0 bottom
FD205  FIDUCIALUFIDUCIAL  [FIDUCIAL-MICRO]  33.4,126.11 0 bottom
FD206  FIDUCIALUFIDUCIAL  [FIDUCIAL-MICRO]  33.4,126.11 0 top
FD207  FIDUCIALUFIDUCIAL  [FIDUCIAL-MICRO]  38.23,142.62 0 top
FD208  FIDUCIALUFIDUCIAL  [FIDUCIAL-MICRO]  38.23,142.62 0 bottom
FD209  FIDUCIALUFIDUCIAL  [FIDUCIAL-MICRO]  41.53,126.11 0 bottom
FD210  FIDUCIALUFIDUCIAL  [FIDUCIAL-MICRO]  41.53,126.11 0 top
FD211  FIDUCIALUFIDUCIAL  [FIDUCIAL-MICRO]  46.35,142.62 0 top
FD212  FIDUCIALUFIDUCIAL  [FIDUCIAL-MICRO]  46.35,142.62 0 bottom
FD213  FIDUCIALUFIDUCIAL  [FIDUCIAL-MICRO]  49.66,126.11 0 bottom
FD214  FIDUCIALUFIDUCIAL  [FIDUCIAL-MICRO]  49.66,126.11 0 top
FD215  FIDUCIALUFIDUCIAL  [FIDUCIAL-MICRO]  54.48,142.62 0 top
FD216  FIDUCIALUFIDUCIAL  [FIDUCIAL-MICRO]  54.48,142.62 0 bottom
FD217  FIDUCIALUFIDUCIAL  [FIDUCIAL-MICRO]  57.78,126.11 0 bottom
FD218  FIDUCIALUFIDUCIAL  [FIDUCIAL-MICRO]  57.78,126.11 0 top
FD219  FIDUCIALUFIDUCIAL  [FIDUCIAL-MICRO]  62.61,142.62 0 top
FD220  FIDUCIALUFIDUCIAL  [FIDUCIAL-MICRO]  62.61,142.62 0 bottom
FD221  FIDUCIALUFIDUCIAL  [FIDUCIAL-MICRO]  65.91,126.11 0 bottom
FD222  FIDUCIALUFIDUCIAL  [FIDUCIAL-MICRO]  65.91,126.11 0 top
FD223  FIDUCIALUFIDUCIAL  [FIDUCIAL-MICRO]  70.74,142.62 0 top
FD224  FIDUCIALUFIDUCIAL  [FIDUCIAL-MICRO]  70.74,142.62 0 bottom
FD225  FIDUCIALUFIDUCIAL  [FIDUCIAL-MICRO]  9.02,145.67 0 bottom
FD226  FIDUCIALUFIDUCIAL  [FIDUCIAL-MICRO]  9.02,145.67 0 top
FD227  FIDUCIALUFIDUCIAL  [FIDUCIAL-MICRO]  13.84,162.18 0 top
FD228  FIDUCIALUFIDUCIAL  [FIDUCIAL-MICRO]  13.84,162.18 0 bottom
FD229  FIDUCIALUFIDUCIAL  [FIDUCIAL-MICRO]  17.14,145.67 0 bottom
FD230  FIDUCIALUFIDUCIAL  [FIDUCIAL-MICRO]  17.14,145.67 0 top
FD231  FIDUCIALUFIDUCIAL  [FIDUCIAL-MICRO]  21.97,162.18 0 top
FD232  FIDUCIALUFIDUCIAL  [FIDUCIAL-MICRO]  21.97,162.18 0 bottom
FD233  FIDUCIALUFIDUCIAL  [FIDUCIAL-MICRO]  25.27,145.67 0 bottom
FD234  FIDUCIALUFIDUCIAL  [FIDUCIAL-MICRO]  25.27,145.67 0 top
FD235  FIDUCIALUFIDUCIAL  [FIDUCIAL-MICRO]  30.1,162.18 0 top
FD236  FIDUCIALUFIDUCIAL  [FIDUCIAL-MICRO]  30.1,162.18 0 bottom
FD237  FIDUCIALUFIDUCIAL  [FIDUCIAL-MICRO]  33.4,145.67 0 bottom
FD238  FIDUCIALUFIDUCIAL  [FIDUCIAL-MICRO]  33.4,145.67 0 top
FD239  FIDUCIALUFIDUCIAL  [FIDUCIAL-MICRO]  38.23,162.18 0 top
FD240  FIDUCIALUFIDUCIAL  [FIDUCIAL-MICRO]  38.23,162.18 0 bottom
FD241  FIDUCIALUFIDUCIAL  [FIDUCIAL-MICRO]  41.53,145.67 0 bottom
FD242  FIDUCIALUFIDUCIAL  [FIDUCIAL-MICRO]  41.53,145.67 0 top
FD243  FIDUCIALUFIDUCIAL  [FIDUCIAL-MICRO]  46.35,162.18 0 top
FD244  FIDUCIALUFIDUCIAL  [FIDUCIAL-MICRO]  46.35,162.18 0 bottom
FD245  FIDUCIALUFIDUCIAL  [FIDUCIAL-MICRO]  49.66,145.67 0 bottom
FD246  FIDUCIALUFIDUCIAL  [FIDUCIAL-MICRO]  49.66,145.67 0 top
FD247  FIDUCIALUFIDUCIAL  [FIDUCIAL-MICRO]  54.48,162.18 0 top
FD248  FIDUCIALUFIDUCIAL  [FIDUCIAL-MICRO]  54.48,162.18 0 bottom
FD249  FIDUCIALUFIDUCIAL  [FIDUCIAL-MICRO]  57.78,145.67 0 bottom
FD250  FIDUCIALUFIDUCIAL  [FIDUCIAL-MICRO]  57.78,145.67 0 top
FD251  FIDUCIALUFIDUCIAL  [FIDUCIAL-MICRO]  62.61,162.18 0 top
FD252  FIDUCIALUFIDUCIAL  [FIDUCIAL-MICRO]  62.61,162.18 0 bottom
FD253  FIDUCIALUFIDUCIAL  [FIDUCIAL-MICRO]  65.91,145.67 0 bottom
FD254  FIDUCIALUFIDUCIAL  [FIDUCIAL-MICRO]  65.91,145.67 0 top
FD255  FIDUCIALUFIDUCIAL  [FIDUCIAL-MICRO]  70.74,162.18 0 top
FD256  FIDUCIALUFIDUCIAL  [FIDUCIAL-MICRO]  70.74,162.18 0 bottom
FRAME1  FRAME-LETTER  [CREATIVE_COMMONS]  -12.19,-7.11 0 top  (outside the outline)
FRAME2  FRAME-LETTER  [CREATIVE_COMMONS]  -4.06,-7.11 0 top  (outside the outline)
FRAME3  FRAME-LETTER  [CREATIVE_COMMONS]  4.06,-7.11 0 top  (outside the outline)
FRAME4  FRAME-LETTER  [CREATIVE_COMMONS]  12.19,-7.11 0 top  (outside the outline)
FRAME5  FRAME-LETTER  [CREATIVE_COMMONS]  20.32,-7.11 0 top  (outside the outline)
FRAME6  FRAME-LETTER  [CREATIVE_COMMONS]  28.45,-7.11 0 top  (outside the outline)
FRAME7  FRAME-LETTER  [CREATIVE_COMMONS]  36.58,-7.11 0 top  (outside the outline)
FRAME8  FRAME-LETTER  [CREATIVE_COMMONS]  44.7,-7.11 0 top  (outside the outline)
FRAME9  FRAME-LETTER  [CREATIVE_COMMONS]  -12.19,12.45 0 top  (outside the outline)
FRAME10  FRAME-LETTER  [CREATIVE_COMMONS]  -4.06,12.45 0 top  (outside the outline)
FRAME11  FRAME-LETTER  [CREATIVE_COMMONS]  4.06,12.45 0 top
FRAME12  FRAME-LETTER  [CREATIVE_COMMONS]  12.19,12.45 0 top
FRAME13  FRAME-LETTER  [CREATIVE_COMMONS]  20.32,12.45 0 top
FRAME14  FRAME-LETTER  [CREATIVE_COMMONS]  28.45,12.45 0 top
FRAME15  FRAME-LETTER  [CREATIVE_COMMONS]  36.58,12.45 0 top
FRAME16  FRAME-LETTER  [CREATIVE_COMMONS]  44.7,12.45 0 top
FRAME17  FRAME-LETTER  [CREATIVE_COMMONS]  -12.19,32 0 top  (outside the outline)
FRAME18  FRAME-LETTER  [CREATIVE_COMMONS]  -4.06,32 0 top  (outside the outline)
FRAME19  FRAME-LETTER  [CREATIVE_COMMONS]  4.06,32 0 top
FRAME20  FRAME-LETTER  [CREATIVE_COMMONS]  12.19,32 0 top
FRAME21  FRAME-LETTER  [CREATIVE_COMMONS]  20.32,32 0 top
FRAME22  FRAME-LETTER  [CREATIVE_COMMONS]  28.45,32 0 top
FRAME23  FRAME-LETTER  [CREATIVE_COMMONS]  36.58,32 0 top
FRAME24  FRAME-LETTER  [CREATIVE_COMMONS]  44.7,32 0 top
FRAME25  FRAME-LETTER  [CREATIVE_COMMONS]  -12.19,51.56 0 top  (outside the outline)
FRAME26  FRAME-LETTER  [CREATIVE_COMMONS]  -4.06,51.56 0 top  (outside the outline)
FRAME27  FRAME-LETTER  [CREATIVE_COMMONS]  4.06,51.56 0 top
FRAME28  FRAME-LETTER  [CREATIVE_COMMONS]  12.19,51.56 0 top
FRAME29  FRAME-LETTER  [CREATIVE_COMMONS]  20.32,51.56 0 top
FRAME30  FRAME-LETTER  [CREATIVE_COMMONS]  28.45,51.56 0 top
FRAME31  FRAME-LETTER  [CREATIVE_COMMONS]  36.58,51.56 0 top
FRAME32  FRAME-LETTER  [CREATIVE_COMMONS]  44.7,51.56 0 top
FRAME33  FRAME-LETTER  [CREATIVE_COMMONS]  -12.19,71.12 0 top  (outside the outline)
FRAME34  FRAME-LETTER  [CREATIVE_COMMONS]  -4.06,71.12 0 top  (outside the outline)
FRAME35  FRAME-LETTER  [CREATIVE_COMMONS]  4.06,71.12 0 top
FRAME36  FRAME-LETTER  [CREATIVE_COMMONS]  12.19,71.12 0 top
FRAME37  FRAME-LETTER  [CREATIVE_COMMONS]  20.32,71.12 0 top
FRAME38  FRAME-LETTER  [CREATIVE_COMMONS]  28.45,71.12 0 top
FRAME39  FRAME-LETTER  [CREATIVE_COMMONS]  36.58,71.12 0 top
FRAME40  FRAME-LETTER  [CREATIVE_COMMONS]  44.7,71.12 0 top
FRAME41  FRAME-LETTER  [CREATIVE_COMMONS]  -12.19,90.68 0 top  (outside the outline)
FRAME42  FRAME-LETTER  [CREATIVE_COMMONS]  -4.06,90.68 0 top  (outside the outline)
FRAME43  FRAME-LETTER  [CREATIVE_COMMONS]  4.06,90.68 0 top
FRAME44  FRAME-LETTER  [CREATIVE_COMMONS]  12.19,90.68 0 top
FRAME45  FRAME-LETTER  [CREATIVE_COMMONS]  20.32,90.68 0 top
FRAME46  FRAME-LETTER  [CREATIVE_COMMONS]  28.45,90.68 0 top
FRAME47  FRAME-LETTER  [CREATIVE_COMMONS]  36.58,90.68 0 top
FRAME48  FRAME-LETTER  [CREATIVE_COMMONS]  44.7,90.68 0 top
FRAME49  FRAME-LETTER  [CREATIVE_COMMONS]  -12.19,110.24 0 top  (outside the outline)
FRAME50  FRAME-LETTER  [CREATIVE_COMMONS]  -4.06,110.24 0 top  (outside the outline)
FRAME51  FRAME-LETTER  [CREATIVE_COMMONS]  4.06,110.24 0 top
FRAME52  FRAME-LETTER  [CREATIVE_COMMONS]  12.19,110.24 0 top
FRAME53  FRAME-LETTER  [CREATIVE_COMMONS]  20.32,110.24 0 top
FRAME54  FRAME-LETTER  [CREATIVE_COMMONS]  28.45,110.24 0 top
FRAME55  FRAME-LETTER  [CREATIVE_COMMONS]  36.58,110.24 0 top
FRAME56  FRAME-LETTER  [CREATIVE_COMMONS]  44.7,110.24 0 top
FRAME57  FRAME-LETTER  [CREATIVE_COMMONS]  -12.19,129.79 0 top  (outside the outline)
FRAME58  FRAME-LETTER  [CREATIVE_COMMONS]  -4.06,129.79 0 top  (outside the outline)
FRAME59  FRAME-LETTER  [CREATIVE_COMMONS]  4.06,129.79 0 top
FRAME60  FRAME-LETTER  [CREATIVE_COMMONS]  12.19,129.79 0 top
FRAME61  FRAME-LETTER  [CREATIVE_COMMONS]  20.32,129.79 0 top
FRAME62  FRAME-LETTER  [CREATIVE_COMMONS]  28.45,129.79 0 top
FRAME63  FRAME-LETTER  [CREATIVE_COMMONS]  36.58,129.79 0 top
FRAME64  FRAME-LETTER  [CREATIVE_COMMONS]  44.7,129.79 0 top
H1  STAND-OFF  [STAND-OFF]  10.67,23.37 0 top
H2  STAND-OFF  [STAND-OFF]  18.8,23.37 0 top
H3  STAND-OFF  [STAND-OFF]  26.92,23.37 0 top
H4  STAND-OFF  [STAND-OFF]  35.05,23.37 0 top
H5  STAND-OFF  [STAND-OFF]  43.18,23.37 0 top
H6  STAND-OFF  [STAND-OFF]  51.31,23.37 0 top
H7  STAND-OFF  [STAND-OFF]  59.44,23.37 0 top
H8  STAND-OFF  [STAND-OFF]  67.56,23.37 0 top
H9  STAND-OFF  [STAND-OFF]  10.67,42.93 0 top
H10  STAND-OFF  [STAND-OFF]  18.8,42.93 0 top
H11  STAND-OFF  [STAND-OFF]  26.92,42.93 0 top
H12  STAND-OFF  [STAND-OFF]  35.05,42.93 0 top
H13  STAND-OFF  [STAND-OFF]  43.18,42.93 0 top
H14  STAND-OFF  [STAND-OFF]  51.31,42.93 0 top
H15  STAND-OFF  [STAND-OFF]  59.44,42.93 0 top
H16  STAND-OFF  [STAND-OFF]  67.56,42.93 0 top
H17  STAND-OFF  [STAND-OFF]  10.67,62.48 0 top
H18  STAND-OFF  [STAND-OFF]  18.8,62.48 0 top
H19  STAND-OFF  [STAND-OFF]  26.92,62.48 0 top
H20  STAND-OFF  [STAND-OFF]  35.05,62.48 0 top
H21  STAND-OFF  [STAND-OFF]  43.18,62.48 0 top
H22  STAND-OFF  [STAND-OFF]  51.31,62.48 0 top
H23  STAND-OFF  [STAND-OFF]  59.44,62.48 0 top
H24  STAND-OFF  [STAND-OFF]  67.56,62.48 0 top
H25  STAND-OFF  [STAND-OFF]  10.67,82.04 0 top
H26  STAND-OFF  [STAND-OFF]  18.8,82.04 0 top
H27  STAND-OFF  [STAND-OFF]  26.92,82.04 0 top
H28  STAND-OFF  [STAND-OFF]  35.05,82.04 0 top
H29  STAND-OFF  [STAND-OFF]  43.18,82.04 0 top
H30  STAND-OFF  [STAND-OFF]  51.31,82.04 0 top
H31  STAND-OFF  [STAND-OFF]  59.44,82.04 0 top
H32  STAND-OFF  [STAND-OFF]  67.56,82.04 0 top
H33  STAND-OFF  [STAND-OFF]  10.67,101.6 0 top
H34  STAND-OFF  [STAND-OFF]  18.8,101.6 0 top
H35  STAND-OFF  [STAND-OFF]  26.92,101.6 0 top
H36  STAND-OFF  [STAND-OFF]  35.05,101.6 0 top
H37  STAND-OFF  [STAND-OFF]  43.18,101.6 0 top
H38  STAND-OFF  [STAND-OFF]  51.31,101.6 0 top
H39  STAND-OFF  [STAND-OFF]  59.44,101.6 0 top
H40  STAND-OFF  [STAND-OFF]  67.56,101.6 0 top
H41  STAND-OFF  [STAND-OFF]  10.67,121.16 0 top
H42  STAND-OFF  [STAND-OFF]  18.8,121.16 0 top
H43  STAND-OFF  [STAND-OFF]  26.92,121.16 0 top
H44  STAND-OFF  [STAND-OFF]  35.05,121.16 0 top
H45  STAND-OFF  [STAND-OFF]  43.18,121.16 0 top
H46  STAND-OFF  [STAND-OFF]  51.31,121.16 0 top
H47  STAND-OFF  [STAND-OFF]  59.44,121.16 0 top
H48  STAND-OFF  [STAND-OFF]  67.56,121.16 0 top
H49  STAND-OFF  [STAND-OFF]  10.67,140.72 0 top
H50  STAND-OFF  [STAND-OFF]  18.8,140.72 0 top
H51  STAND-OFF  [STAND-OFF]  26.92,140.72 0 top
H52  STAND-OFF  [STAND-OFF]  35.05,140.72 0 top
H53  STAND-OFF  [STAND-OFF]  43.18,140.72 0 top
H54  STAND-OFF  [STAND-OFF]  51.31,140.72 0 top
H55  STAND-OFF  [STAND-OFF]  59.44,140.72 0 top
H56  STAND-OFF  [STAND-OFF]  67.56,140.72 0 top
H57  STAND-OFF  [STAND-OFF]  10.67,160.27 0 top
H58  STAND-OFF  [STAND-OFF]  18.8,160.27 0 top
H59  STAND-OFF  [STAND-OFF]  26.92,160.27 0 top
H60  STAND-OFF  [STAND-OFF]  35.05,160.27 0 top
H61  STAND-OFF  [STAND-OFF]  43.18,160.27 0 top
H62  STAND-OFF  [STAND-OFF]  51.31,160.27 0 top
H63  STAND-OFF  [STAND-OFF]  59.44,160.27 0 top
H64  STAND-OFF  [STAND-OFF]  67.56,160.27 0 top
I2C  JUMPER-SMT_3_2-NC_TRACE_SILK  [SMT-JUMPER_3_2-NC_TRACE_SILK]  13.21,14.48 270 bottom
I2C1  JUMPER-SMT_3_2-NC_TRACE_SILK  [SMT-JUMPER_3_2-NC_TRACE_SILK]  21.34,14.48 270 bottom
I2C2  JUMPER-SMT_3_2-NC_TRACE_SILK  [SMT-JUMPER_3_2-NC_TRACE_SILK]  29.46,14.48 270 bottom
I2C3  JUMPER-SMT_3_2-NC_TRACE_SILK  [SMT-JUMPER_3_2-NC_TRACE_SILK]  37.59,14.48 270 bottom
I2C4  JUMPER-SMT_3_2-NC_TRACE_SILK  [SMT-JUMPER_3_2-NC_TRACE_SILK]  45.72,14.48 270 bottom
I2C5  JUMPER-SMT_3_2-NC_TRACE_SILK  [SMT-JUMPER_3_2-NC_TRACE_SILK]  53.85,14.48 270 bottom
I2C6  JUMPER-SMT_3_2-NC_TRACE_SILK  [SMT-JUMPER_3_2-NC_TRACE_SILK]  61.98,14.48 270 bottom
I2C7  JUMPER-SMT_3_2-NC_TRACE_SILK  [SMT-JUMPER_3_2-NC_TRACE_SILK]  70.1,14.48 270 bottom
I2C8  JUMPER-SMT_3_2-NC_TRACE_SILK  [SMT-JUMPER_3_2-NC_TRACE_SILK]  13.21,34.04 270 bottom
I2C9  JUMPER-SMT_3_2-NC_TRACE_SILK  [SMT-JUMPER_3_2-NC_TRACE_SILK]  21.34,34.04 270 bottom
I2C10  JUMPER-SMT_3_2-NC_TRACE_SILK  [SMT-JUMPER_3_2-NC_TRACE_SILK]  29.46,34.04 270 bottom
I2C11  JUMPER-SMT_3_2-NC_TRACE_SILK  [SMT-JUMPER_3_2-NC_TRACE_SILK]  37.59,34.04 270 bottom
I2C12  JUMPER-SMT_3_2-NC_TRACE_SILK  [SMT-JUMPER_3_2-NC_TRACE_SILK]  45.72,34.04 270 bottom
I2C13  JUMPER-SMT_3_2-NC_TRACE_SILK  [SMT-JUMPER_3_2-NC_TRACE_SILK]  53.85,34.04 270 bottom
I2C14  JUMPER-SMT_3_2-NC_TRACE_SILK  [SMT-JUMPER_3_2-NC_TRACE_SILK]  61.98,34.04 270 bottom
I2C15  JUMPER-SMT_3_2-NC_TRACE_SILK  [SMT-JUMPER_3_2-NC_TRACE_SILK]  70.1,34.04 270 bottom
I2C16  JUMPER-SMT_3_2-NC_TRACE_SILK  [SMT-JUMPER_3_2-NC_TRACE_SILK]  13.21,53.59 270 bottom
I2C17  JUMPER-SMT_3_2-NC_TRACE_SILK  [SMT-JUMPER_3_2-NC_TRACE_SILK]  21.34,53.59 270 bottom
I2C18  JUMPER-SMT_3_2-NC_TRACE_SILK  [SMT-JUMPER_3_2-NC_TRACE_SILK]  29.46,53.59 270 bottom
I2C19  JUMPER-SMT_3_2-NC_TRACE_SILK  [SMT-JUMPER_3_2-NC_TRACE_SILK]  37.59,53.59 270 bottom
I2C20  JUMPER-SMT_3_2-NC_TRACE_SILK  [SMT-JUMPER_3_2-NC_TRACE_SILK]  45.72,53.59 270 bottom
I2C21  JUMPER-SMT_3_2-NC_TRACE_SILK  [SMT-JUMPER_3_2-NC_TRACE_SILK]  53.85,53.59 270 bottom
I2C22  JUMPER-SMT_3_2-NC_TRACE_SILK  [SMT-JUMPER_3_2-NC_TRACE_SILK]  61.98,53.59 270 bottom
I2C23  JUMPER-SMT_3_2-NC_TRACE_SILK  [SMT-JUMPER_3_2-NC_TRACE_SILK]  70.1,53.59 270 bottom
I2C24  JUMPER-SMT_3_2-NC_TRACE_SILK  [SMT-JUMPER_3_2-NC_TRACE_SILK]  13.21,73.15 270 bottom
I2C25  JUMPER-SMT_3_2-NC_TRACE_SILK  [SMT-JUMPER_3_2-NC_TRACE_SILK]  21.34,73.15 270 bottom
I2C26  JUMPER-SMT_3_2-NC_TRACE_SILK  [SMT-JUMPER_3_2-NC_TRACE_SILK]  29.46,73.15 270 bottom
I2C27  JUMPER-SMT_3_2-NC_TRACE_SILK  [SMT-JUMPER_3_2-NC_TRACE_SILK]  37.59,73.15 270 bottom
I2C28  JUMPER-SMT_3_2-NC_TRACE_SILK  [SMT-JUMPER_3_2-NC_TRACE_SILK]  45.72,73.15 270 bottom
I2C29  JUMPER-SMT_3_2-NC_TRACE_SILK  [SMT-JUMPER_3_2-NC_TRACE_SILK]  53.85,73.15 270 bottom
I2C30  JUMPER-SMT_3_2-NC_TRACE_SILK  [SMT-JUMPER_3_2-NC_TRACE_SILK]  61.98,73.15 270 bottom
I2C31  JUMPER-SMT_3_2-NC_TRACE_SILK  [SMT-JUMPER_3_2-NC_TRACE_SILK]  70.1,73.15 270 bottom
I2C32  JUMPER-SMT_3_2-NC_TRACE_SILK  [SMT-JUMPER_3_2-NC_TRACE_SILK]  13.21,92.71 270 bottom
I2C33  JUMPER-SMT_3_2-NC_TRACE_SILK  [SMT-JUMPER_3_2-NC_TRACE_SILK]  21.34,92.71 270 bottom
I2C34  JUMPER-SMT_3_2-NC_TRACE_SILK  [SMT-JUMPER_3_2-NC_TRACE_SILK]  29.46,92.71 270 bottom
I2C35  JUMPER-SMT_3_2-NC_TRACE_SILK  [SMT-JUMPER_3_2-NC_TRACE_SILK]  37.59,92.71 270 bottom
I2C36  JUMPER-SMT_3_2-NC_TRACE_SILK  [SMT-JUMPER_3_2-NC_TRACE_SILK]  45.72,92.71 270 bottom
I2C37  JUMPER-SMT_3_2-NC_TRACE_SILK  [SMT-JUMPER_3_2-NC_TRACE_SILK]  53.85,92.71 270 bottom
I2C38  JUMPER-SMT_3_2-NC_TRACE_SILK  [SMT-JUMPER_3_2-NC_TRACE_SILK]  61.98,92.71 270 bottom
I2C39  JUMPER-SMT_3_2-NC_TRACE_SILK  [SMT-JUMPER_3_2-NC_TRACE_SILK]  70.1,92.71 270 bottom
I2C40  JUMPER-SMT_3_2-NC_TRACE_SILK  [SMT-JUMPER_3_2-NC_TRACE_SILK]  13.21,112.27 270 bottom
I2C41  JUMPER-SMT_3_2-NC_TRACE_SILK  [SMT-JUMPER_3_2-NC_TRACE_SILK]  21.34,112.27 270 bottom
I2C42  JUMPER-SMT_3_2-NC_TRACE_SILK  [SMT-JUMPER_3_2-NC_TRACE_SILK]  29.46,112.27 270 bottom
I2C43  JUMPER-SMT_3_2-NC_TRACE_SILK  [SMT-JUMPER_3_2-NC_TRACE_SILK]  37.59,112.27 270 bottom
I2C44  JUMPER-SMT_3_2-NC_TRACE_SILK  [SMT-JUMPER_3_2-NC_TRACE_SILK]  45.72,112.27 270 bottom
I2C45  JUMPER-SMT_3_2-NC_TRACE_SILK  [SMT-JUMPER_3_2-NC_TRACE_SILK]  53.85,112.27 270 bottom
I2C46  JUMPER-SMT_3_2-NC_TRACE_SILK  [SMT-JUMPER_3_2-NC_TRACE_SILK]  61.98,112.27 270 bottom
I2C47  JUMPER-SMT_3_2-NC_TRACE_SILK  [SMT-JUMPER_3_2-NC_TRACE_SILK]  70.1,112.27 270 bottom
I2C48  JUMPER-SMT_3_2-NC_TRACE_SILK  [SMT-JUMPER_3_2-NC_TRACE_SILK]  13.21,131.83 270 bottom
I2C49  JUMPER-SMT_3_2-NC_TRACE_SILK  [SMT-JUMPER_3_2-NC_TRACE_SILK]  21.34,131.83 270 bottom
I2C50  JUMPER-SMT_3_2-NC_TRACE_SILK  [SMT-JUMPER_3_2-NC_TRACE_SILK]  29.46,131.83 270 bottom
I2C51  JUMPER-SMT_3_2-NC_TRACE_SILK  [SMT-JUMPER_3_2-NC_TRACE_SILK]  37.59,131.83 270 bottom
I2C52  JUMPER-SMT_3_2-NC_TRACE_SILK  [SMT-JUMPER_3_2-NC_TRACE_SILK]  45.72,131.83 270 bottom
I2C53  JUMPER-SMT_3_2-NC_TRACE_SILK  [SMT-JUMPER_3_2-NC_TRACE_SILK]  53.85,131.83 270 bottom
I2C54  JUMPER-SMT_3_2-NC_TRACE_SILK  [SMT-JUMPER_3_2-NC_TRACE_SILK]  61.98,131.83 270 bottom
I2C55  JUMPER-SMT_3_2-NC_TRACE_SILK  [SMT-JUMPER_3_2-NC_TRACE_SILK]  70.1,131.83 270 bottom
I2C56  JUMPER-SMT_3_2-NC_TRACE_SILK  [SMT-JUMPER_3_2-NC_TRACE_SILK]  13.21,151.38 270 bottom
I2C57  JUMPER-SMT_3_2-NC_TRACE_SILK  [SMT-JUMPER_3_2-NC_TRACE_SILK]  21.34,151.38 270 bottom
I2C58  JUMPER-SMT_3_2-NC_TRACE_SILK  [SMT-JUMPER_3_2-NC_TRACE_SILK]  29.46,151.38 270 bottom
I2C59  JUMPER-SMT_3_2-NC_TRACE_SILK  [SMT-JUMPER_3_2-NC_TRACE_SILK]  37.59,151.38 270 bottom
I2C60  JUMPER-SMT_3_2-NC_TRACE_SILK  [SMT-JUMPER_3_2-NC_TRACE_SILK]  45.72,151.38 270 bottom
I2C61  JUMPER-SMT_3_2-NC_TRACE_SILK  [SMT-JUMPER_3_2-NC_TRACE_SILK]  53.85,151.38 270 bottom
I2C62  JUMPER-SMT_3_2-NC_TRACE_SILK  [SMT-JUMPER_3_2-NC_TRACE_SILK]  61.98,151.38 270 bottom
I2C63  JUMPER-SMT_3_2-NC_TRACE_SILK  [SMT-JUMPER_3_2-NC_TRACE_SILK]  70.1,151.38 270 bottom
J1  QWIIC_RIGHT_ANGLE  [JST04_1MM_RA]  10.67,11.94 0 top
J2  [1X01_1MM_NO_SILK]  13.21,20.83 0 top
J3  [1X01_1MM_NO_SILK]  8.13,20.83 0 top
J4  QWIIC_RIGHT_ANGLE  [JST04_1MM_RA]  18.8,11.94 0 top
J5  [1X01_1MM_NO_SILK]  21.34,20.83 0 top
J6  [1X01_1MM_NO_SILK]  16.26,20.83 0 top
J7  QWIIC_RIGHT_ANGLE  [JST04_1MM_RA]  26.92,11.94 0 top
J8  [1X01_1MM_NO_SILK]  29.46,20.83 0 top
J9  [1X01_1MM_NO_SILK]  24.38,20.83 0 top
J10  QWIIC_RIGHT_ANGLE  [JST04_1MM_RA]  35.05,11.94 0 top
J11  [1X01_1MM_NO_SILK]  37.59,20.83 0 top
J12  [1X01_1MM_NO_SILK]  32.51,20.83 0 top
J13  QWIIC_RIGHT_ANGLE  [JST04_1MM_RA]  43.18,11.94 0 top
J14  [1X01_1MM_NO_SILK]  45.72,20.83 0 top
J15  [1X01_1MM_NO_SILK]  40.64,20.83 0 top
J16  QWIIC_RIGHT_ANGLE  [JST04_1MM_RA]  51.31,11.94 0 top
J17  [1X01_1MM_NO_SILK]  53.85,20.83 0 top
J18  [1X01_1MM_NO_SILK]  48.77,20.83 0 top
J19  QWIIC_RIGHT_ANGLE  [JST04_1MM_RA]  59.44,11.94 0 top
J20  [1X01_1MM_NO_SILK]  61.98,20.83 0 top
J21  [1X01_1MM_NO_SILK]  56.9,20.83 0 top
J22  QWIIC_RIGHT_ANGLE  [JST04_1MM_RA]  67.56,11.94 0 top
J23  [1X01_1MM_NO_SILK]  70.1,20.83 0 top
J24  [1X01_1MM_NO_SILK]  65.02,20.83 0 top
J25  QWIIC_RIGHT_ANGLE  [JST04_1MM_RA]  10.67,31.5 0 top
J26  [1X01_1MM_NO_SILK]  13.21,40.39 0 top
J27  [1X01_1MM_NO_SILK]  8.13,40.39 0 top
J28  QWIIC_RIGHT_ANGLE  [JST04_1MM_RA]  18.8,31.5 0 top
J29  [1X01_1MM_NO_SILK]  21.34,40.39 0 top
J30  [1X01_1MM_NO_SILK]  16.26,40.39 0 top
J31  QWIIC_RIGHT_ANGLE  [JST04_1MM_RA]  26.92,31.5 0 top
J32  [1X01_1MM_NO_SILK]  29.46,40.39 0 top
J33  [1X01_1MM_NO_SILK]  24.38,40.39 0 top
J34  QWIIC_RIGHT_ANGLE  [JST04_1MM_RA]  35.05,31.5 0 top
J35  [1X01_1MM_NO_SILK]  37.59,40.39 0 top
J36  [1X01_1MM_NO_SILK]  32.51,40.39 0 top
J37  QWIIC_RIGHT_ANGLE  [JST04_1MM_RA]  43.18,31.5 0 top
J38  [1X01_1MM_NO_SILK]  45.72,40.39 0 top
J39  [1X01_1MM_NO_SILK]  40.64,40.39 0 top
J40  QWIIC_RIGHT_ANGLE  [JST04_1MM_RA]  51.31,31.5 0 top
J41  [1X01_1MM_NO_SILK]  53.85,40.39 0 top
J42  [1X01_1MM_NO_SILK]  48.77,40.39 0 top
J43  QWIIC_RIGHT_ANGLE  [JST04_1MM_RA]  59.44,31.5 0 top
J44  [1X01_1MM_NO_SILK]  61.98,40.39 0 top
J45  [1X01_1MM_NO_SILK]  56.9,40.39 0 top
J46  QWIIC_RIGHT_ANGLE  [JST04_1MM_RA]  67.56,31.5 0 top
J47  [1X01_1MM_NO_SILK]  70.1,40.39 0 top
J48  [1X01_1MM_NO_SILK]  65.02,40.39 0 top
J49  QWIIC_RIGHT_ANGLE  [JST04_1MM_RA]  10.67,51.05 0 top
J50  [1X01_1MM_NO_SILK]  13.21,59.94 0 top
J51  [1X01_1MM_NO_SILK]  8.13,59.94 0 top
J52  QWIIC_RIGHT_ANGLE  [JST04_1MM_RA]  18.8,51.05 0 top
J53  [1X01_1MM_NO_SILK]  21.34,59.94 0 top
J54  [1X01_1MM_NO_SILK]  16.26,59.94 0 top
J55  QWIIC_RIGHT_ANGLE  [JST04_1MM_RA]  26.92,51.05 0 top
J56  [1X01_1MM_NO_SILK]  29.46,59.94 0 top
J57  [1X01_1MM_NO_SILK]  24.38,59.94 0 top
J58  QWIIC_RIGHT_ANGLE  [JST04_1MM_RA]  35.05,51.05 0 top
J59  [1X01_1MM_NO_SILK]  37.59,59.94 0 top
J60  [1X01_1MM_NO_SILK]  32.51,59.94 0 top
J61  QWIIC_RIGHT_ANGLE  [JST04_1MM_RA]  43.18,51.05 0 top
J62  [1X01_1MM_NO_SILK]  45.72,59.94 0 top
J63  [1X01_1MM_NO_SILK]  40.64,59.94 0 top
J64  QWIIC_RIGHT_ANGLE  [JST04_1MM_RA]  51.31,51.05 0 top
J65  [1X01_1MM_NO_SILK]  53.85,59.94 0 top
J66  [1X01_1MM_NO_SILK]  48.77,59.94 0 top
J67  QWIIC_RIGHT_ANGLE  [JST04_1MM_RA]  59.44,51.05 0 top
J68  [1X01_1MM_NO_SILK]  61.98,59.94 0 top
J69  [1X01_1MM_NO_SILK]  56.9,59.94 0 top
J70  QWIIC_RIGHT_ANGLE  [JST04_1MM_RA]  67.56,51.05 0 top
J71  [1X01_1MM_NO_SILK]  70.1,59.94 0 top
J72  [1X01_1MM_NO_SILK]  65.02,59.94 0 top
J73  QWIIC_RIGHT_ANGLE  [JST04_1MM_RA]  10.67,70.61 0 top
J74  [1X01_1MM_NO_SILK]  13.21,79.5 0 top
J75  [1X01_1MM_NO_SILK]  8.13,79.5 0 top
J76  QWIIC_RIGHT_ANGLE  [JST04_1MM_RA]  18.8,70.61 0 top
J77  [1X01_1MM_NO_SILK]  21.34,79.5 0 top
J78  [1X01_1MM_NO_SILK]  16.26,79.5 0 top
J79  QWIIC_RIGHT_ANGLE  [JST04_1MM_RA]  26.92,70.61 0 top
J80  [1X01_1MM_NO_SILK]  29.46,79.5 0 top
J81  [1X01_1MM_NO_SILK]  24.38,79.5 0 top
J82  QWIIC_RIGHT_ANGLE  [JST04_1MM_RA]  35.05,70.61 0 top
J83  [1X01_1MM_NO_SILK]  37.59,79.5 0 top